# Altium PCB LambdaTV_Cover.PcbDoc
Units mm, origin at the board's own origin, x right, y up, seen from the top; angles counter-clockwise.
Board outline 68 x 36 mm, 2 copper layers (Top Layer, Bottom Layer); 4 components, 24 nets, 4 pads, 0 vias.
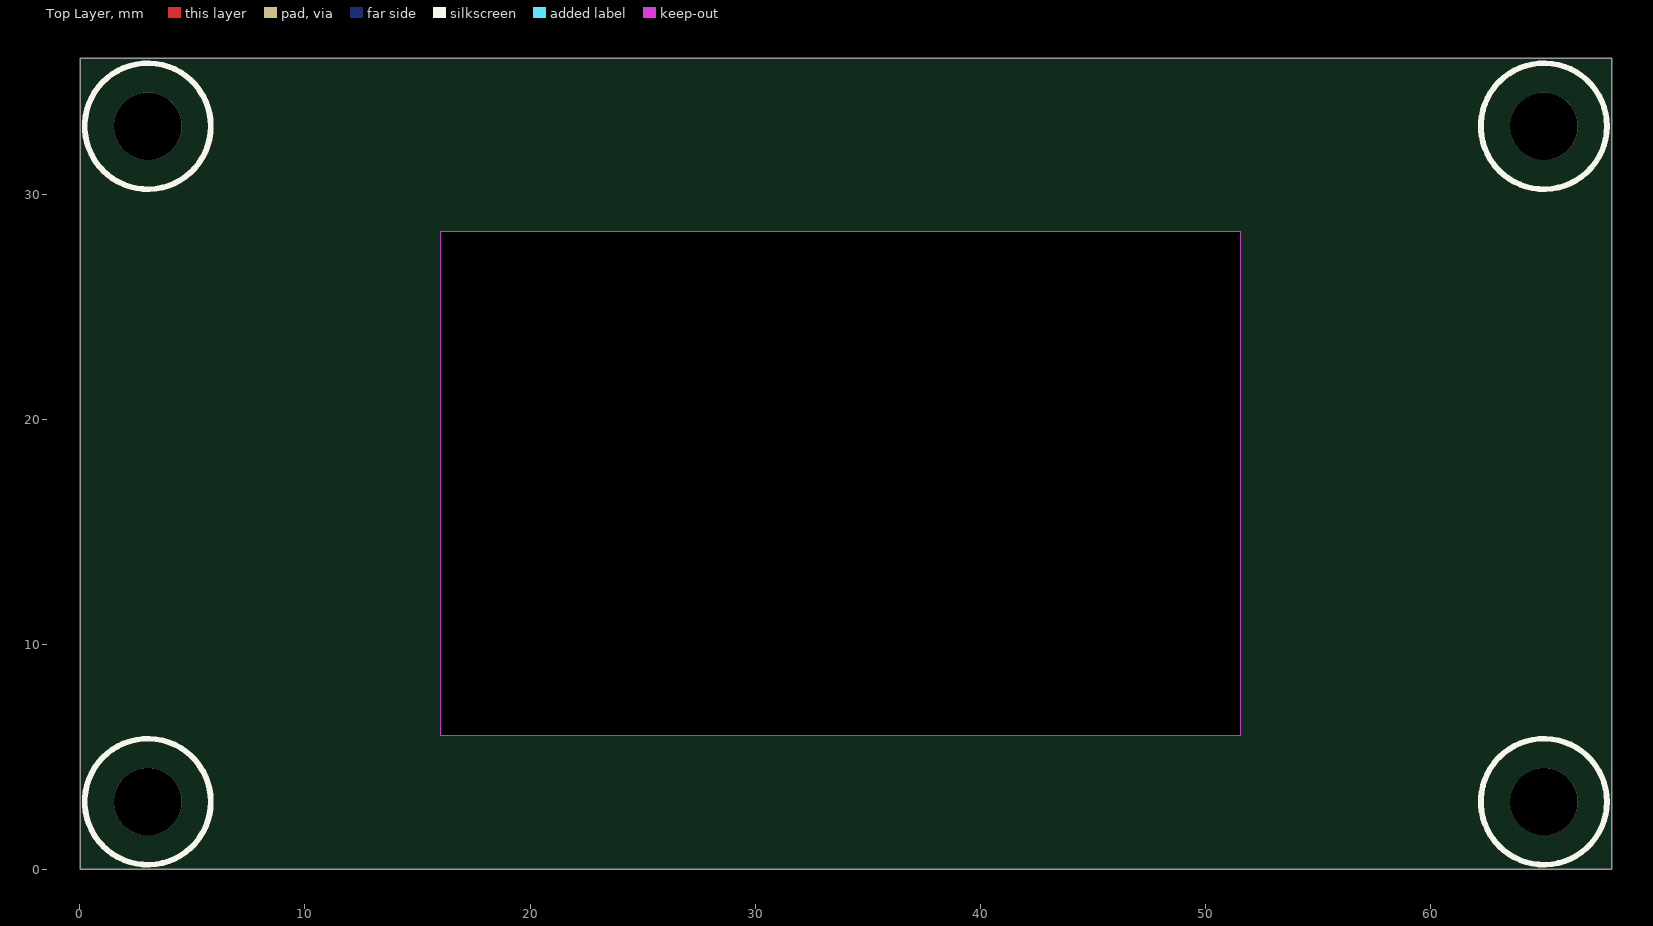
[diagram p0: Top Layer view]
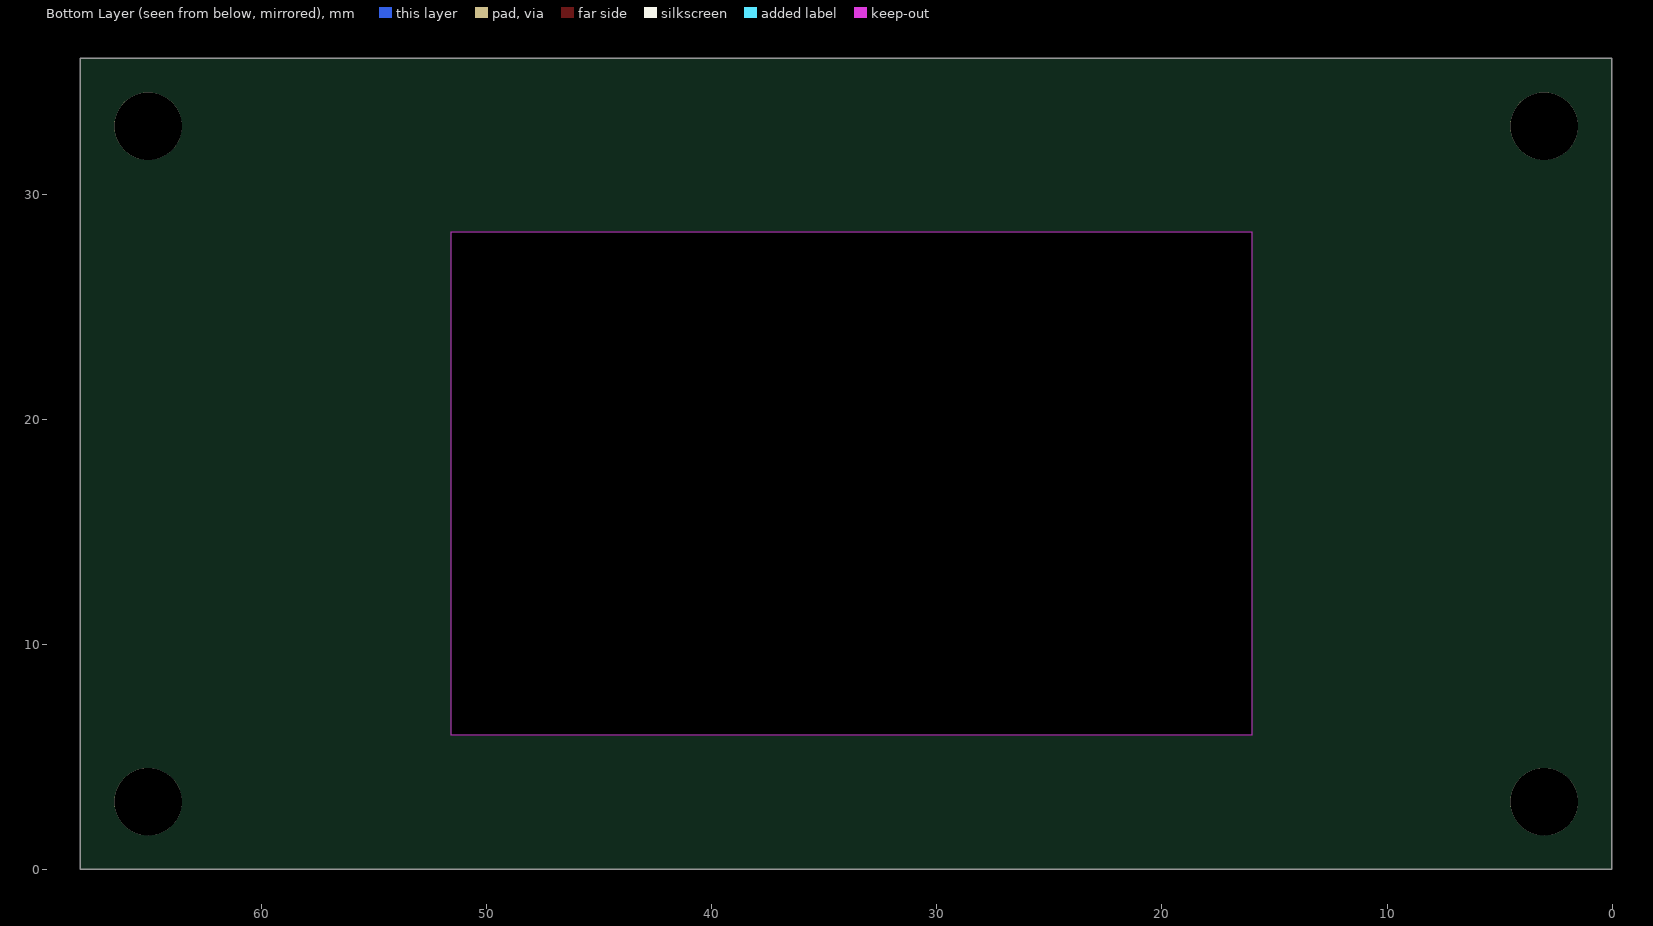
[diagram p1: Bottom Layer view, seen from below]

## Layer stack, top to bottom
Top Solder: solder mask 0.0102, Solder Resist, Dk 3.5
Top Layer: signal copper 0.0356
Dielectric 1: dielectric 0.32, FR-4, Dk 4.8
Bottom Layer: signal copper 0.0356
Bottom Solder: solder mask 0.0102, Solder Resist, Dk 3.5

## Board outline
68.031,0.03 68.031,36.03 0.031,36.03 0.031,0.03
cut-out: 16.002,5.969 51.562,5.969 51.562,28.321 16.002,28.321

## Design rules (kind name [scope] priority, off if disabled: settings)
Clearance Inploy [InPoly] p1: gap=0.508 ignorepadtopadclearanceinfootprint=FALSE
Clearance [All] p2: gap=0.178 ignorepadtopadclearanceinfootprint=FALSE
ComponentClearance [All] p1: gap=0 collisioncheckmode=3 verticalgap=0 showdistances=FALSE
PolygonConnect [All] p1: connectstyle=Relief reliefconductorwidth=0.254 reliefentries=4 polygonreliefangle="90 Angle" airgapwidth=0.254
RoutingVias [All] p1: holewidth=0.381 width=0.762 viastyle="Through Hole" minholewidth=0.381 minwidth=0.762 maxholewidth=0.711 maxwidth=1.27
SolderMaskExpansion [All] p1: expansion=0.102
Width [All] p1: maxlimit=1.27 minlimit=0.254 preferedwidth=0.254 minimp=50.000000 maximp=50.000000 favimp=50.000000
29 further rules are at their usual default settings.

## Components (designator, comment, footprint, x,y, rotation, side; value= is the part's Value field where it differs from the comment)
? "Comment" "3MM定位孔 无电镀" 3.031,3.03 r180 top
? "Comment" "3MM定位孔 无电镀" 65.031,3.03 r180 top
? "Comment" "3MM定位孔 无电镀" 65.031,33.03 r180 top
? "Comment" "3MM定位孔 无电镀" 3.031,33.03 r180 top

## Footprints (in the part's own frame and the unit in brackets; to place one, negate y for a bottom-side part, rotate by r counter-clockwise, add the part's x,y. Pads: shape width x height; smd on the part's side, far side on the other; paste and mask are expansions set on the pad)
"3MM定位孔 无电镀" [mm]
  round 3 hole 3: 0(0.007,0.01)
  silkscreen extent -2.79,-2.79 2.8,2.81

## Nets (pads, with @x,y where several pads share a name; then routed paths per layer and width w, separated by ;. In a path a pad name is that pad's centre, name@x,y a point inside that pad or via, vN(x,y) a via of type N, cw(c..) or ccw(c..) an arc to the next point about the centre after c; other vN are vias at no path point)
ADC: 
ADC_EX: 
EN: 
GND: 
GPIO0: 
GPIO2: 
GPIO4: 
GPIO5: 
GPIO9: 
GPIO10: 
GPIO12: 
GPIO13: 
GPIO14: 
GPIO15: 
GPIO16: 
NRST: 
RXD0: 
SPI_CLK: 
SPI_INT: 
SPI_MISO: 
SPI_MOSI: 
TXD0: 
VDD3V3: 
VDD5V: 
pads on no net: ?.0

## Silkscreen, mask and mechanical layers (free items; w line width, h text height)
Mechanical 1:
  lines w0.152: 0.031,0.03 68.031,0.03 68.031,36.03 0.031,36.03 0.031,0.03 ; 16.002,5.969 16.002,28.321 51.562,28.321 51.562,5.969 16.002,5.969